# EAGLE board esp8266_ir_blaster-Panel (EAGLE 9.1.2), part 1 of 2
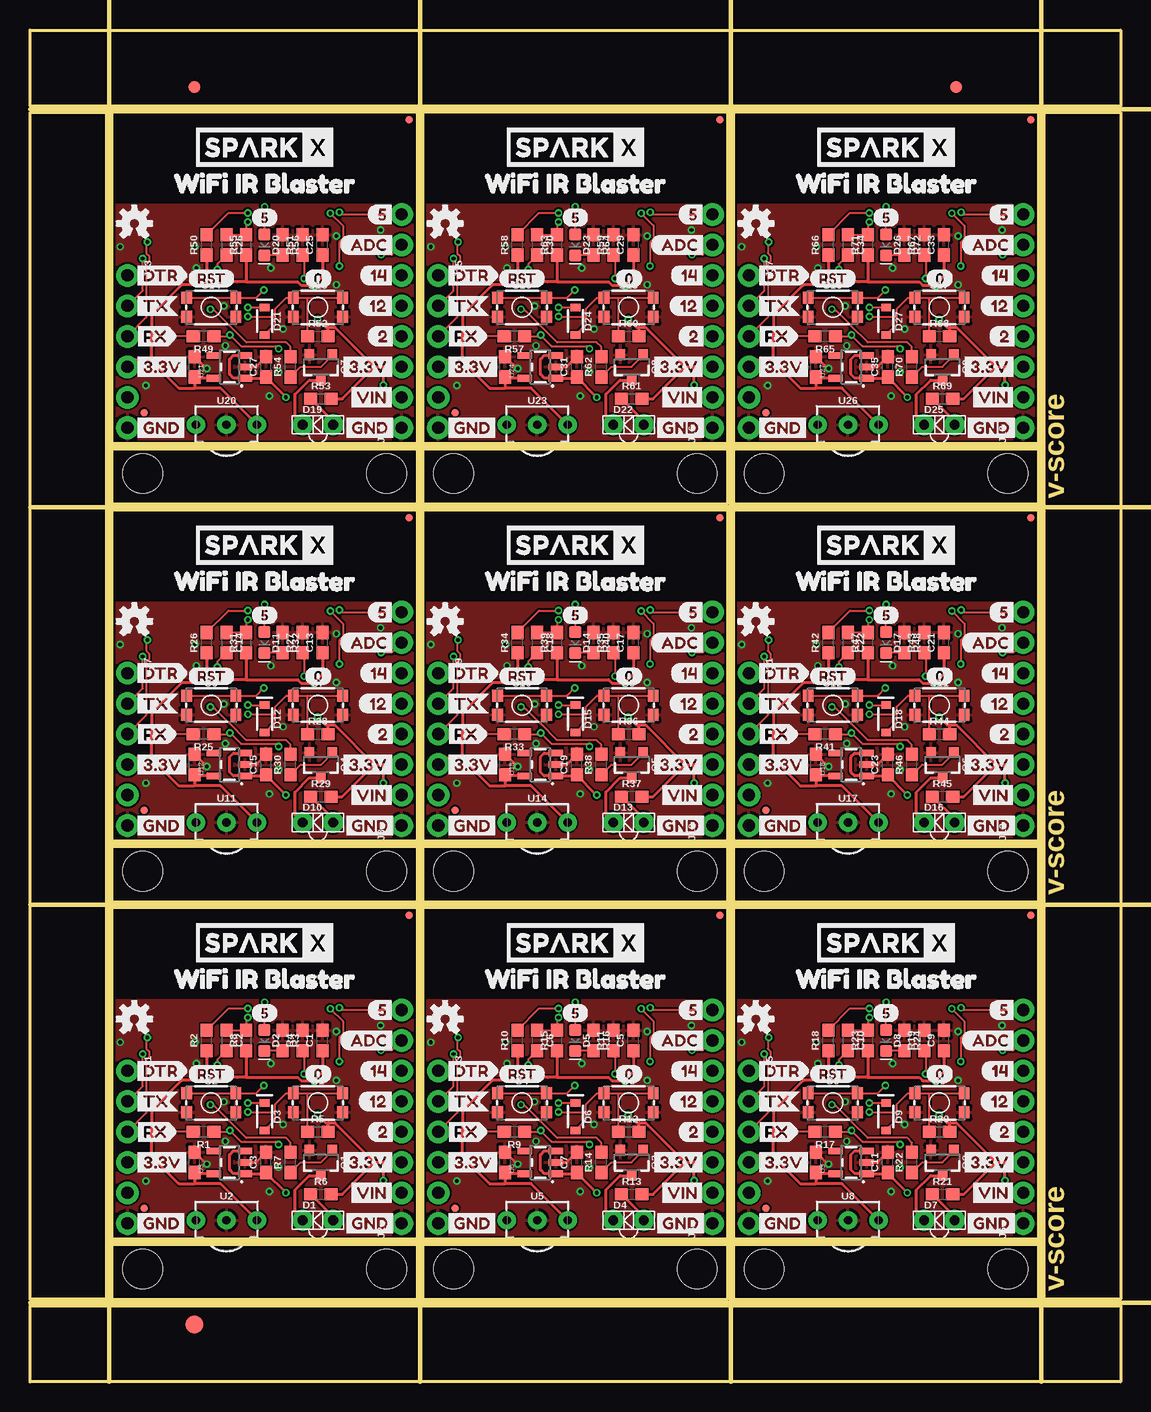
[diagram p0: board, top side]
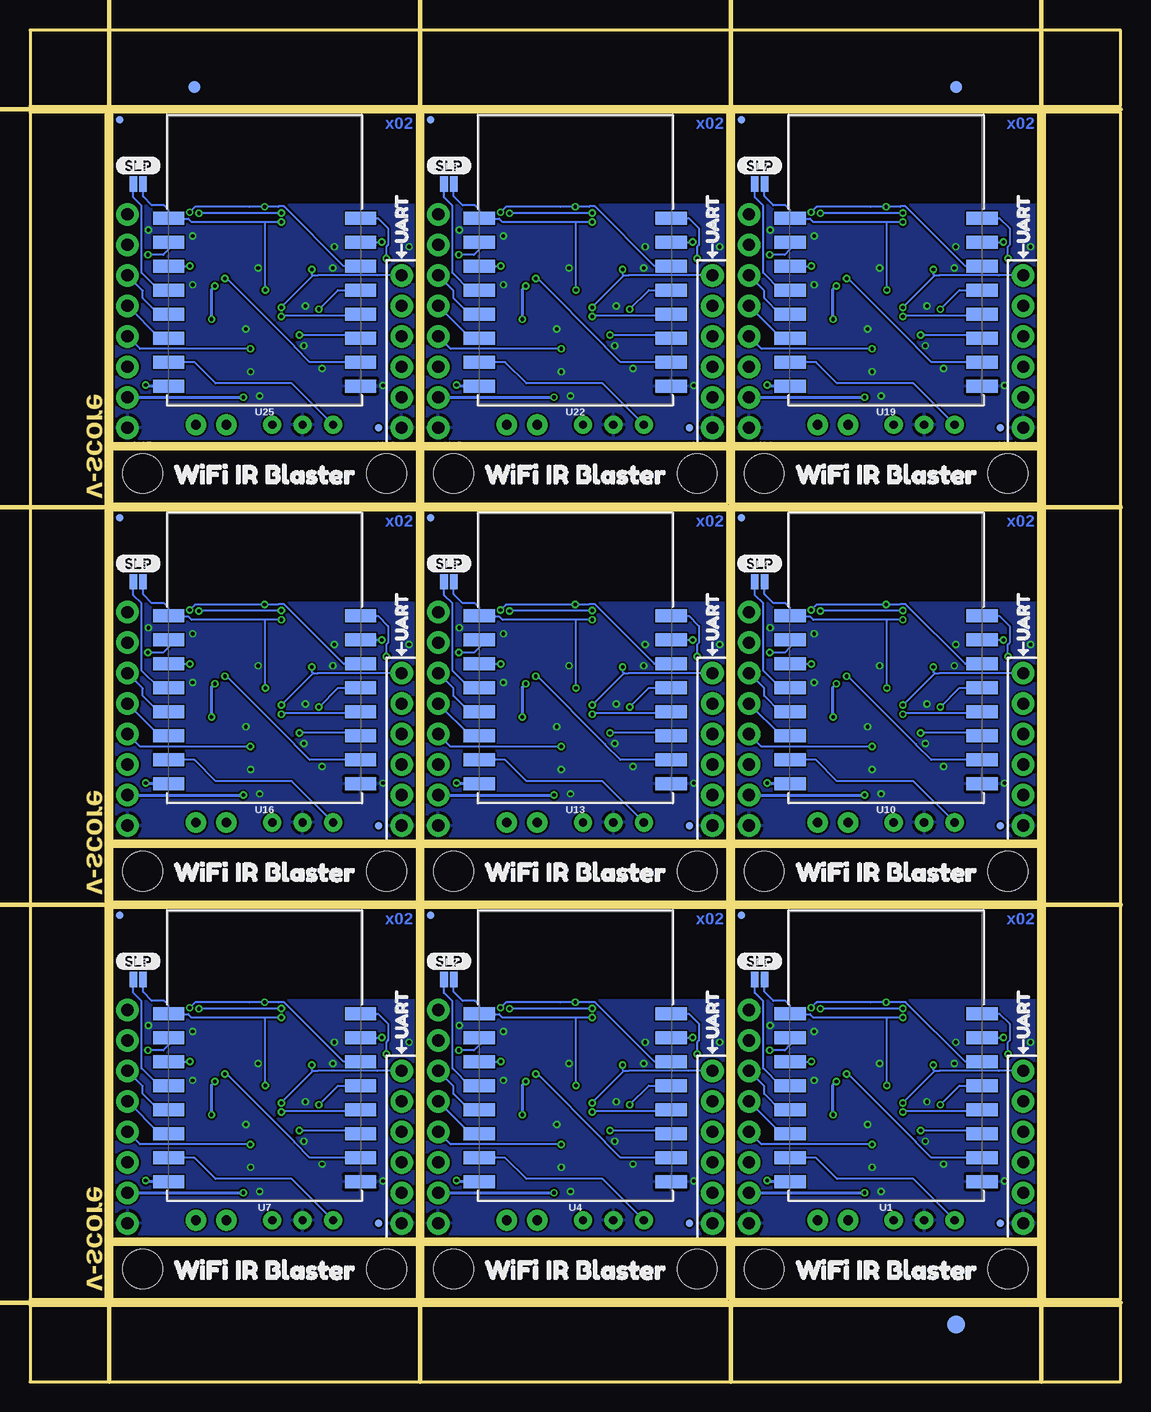
[diagram p1: board, bottom side, seen from below]

Size 90.93 x 112.65 mm. Coordinates in mm from the lower left corner, seen from the top.
Outline: 6.86,11.94 32.26,11.94 32.26,39.5 6.86,39.5 6.86,11.94
Outline: 6.86,11.43 32.26,11.43 32.26,6.86 6.86,6.86 6.86,11.43
Outline: 32.77,11.94 58.17,11.94 58.17,39.5 32.77,39.5 32.77,11.94
Outline: 32.77,11.43 58.17,11.43 58.17,6.86 32.77,6.86 32.77,11.43
Outline: 58.67,11.94 84.07,11.94 84.07,39.5 58.67,39.5 58.67,11.94
Outline: 58.67,11.43 84.07,11.43 84.07,6.86 58.67,6.86 58.67,11.43
Outline: 6.86,45.08 32.26,45.08 32.26,72.64 6.86,72.64 6.86,45.08
Outline: 6.86,44.58 32.26,44.58 32.26,40 6.86,40 6.86,44.58
Outline: 32.77,45.08 58.17,45.08 58.17,72.64 32.77,72.64 32.77,45.08
Outline: 32.77,44.58 58.17,44.58 58.17,40 32.77,40 32.77,44.58
Outline: 58.67,45.08 84.07,45.08 84.07,72.64 58.67,72.64 58.67,45.08
Outline: 58.67,44.58 84.07,44.58 84.07,40 58.67,40 58.67,44.58
Outline: 6.86,78.23 32.26,78.23 32.26,105.79 6.86,105.79 6.86,78.23
Outline: 6.86,77.72 32.26,77.72 32.26,73.15 6.86,73.15 6.86,77.72
Outline: 32.77,78.23 58.17,78.23 58.17,105.79 32.77,105.79 32.77,78.23
Outline: 32.77,77.72 58.17,77.72 58.17,73.15 32.77,73.15 32.77,77.72
Outline: 58.67,78.23 84.07,78.23 84.07,105.79 58.67,105.79 58.67,78.23
Outline: 58.67,77.72 84.07,77.72 84.07,73.15 58.67,73.15 58.67,77.72
Outline: 0,6.35 90.93,6.35 90.93,0 0,0 0,6.35
Outline: 84.58,105.79 90.93,105.79 90.93,6.86 84.58,6.86 84.58,105.79
Outline: 0,112.65 90.93,112.65 90.93,106.3 0,106.3 0,112.65
Outline: 0,105.79 6.35,105.79 6.35,6.86 0,6.86 0,105.79
Copper layers (1*16): Top 0.035mm / dielectric 1.5mm / Bottom 0.035mm
Design rules "SparkFun-2-layer-PCBWay-LIMIT": minimum track width 6mil, minimum drill 0.3mm, track to track 6mil, track to pad 6mil, pad to pad 6mil, via to via 6mil, smd to smd 6mil, copper to edge 6mil, drill to drill 6mil, minimum pad ring 6mil, minimum via ring 6mil, stop-mask expansion 4mil, vias tented up to drill 25mil, thermal gap 10mil
Milling: 17 lines

## Footprints (pad centres in the part's own frame; a part is rotated, then mirrored left to right if it is on the bottom)
0603 = smd 1.1 x 1: 1 -0.85,0; 2 0.85,0
LTE-302 = drill 0.8 pad 1.714: A 1.27,0; C -1.27,0
LED-0603 = smd 1 x 1: A -0.877,0; C 0.877,0
SOD-323 = smd 0.63 x 0.83: A 1.15,0; C -1.15,0
FIDUCIAL-1X2 = smd 1 x 1: 1 0,0
FIDUCIAL-1.5X3 = smd 1.5 x 1.5: 1 0,0
FIDUCIAL-MICRO = smd 0.635 x 0.635: 1 0,0
STAND-OFF = hole 3.302: 0,0
1X06_NO_SILK = drill 1.016 pad 1.88: 1 0,0; 2 2.54,0; 3 5.08,0; 4 7.62,0; 5 10.16,0; 6 12.7,0
1X08_NO_SILK = drill 1.016 pad 1.88: 1 0,0; 2 2.54,0; 3 5.08,0; 4 7.62,0; 5 10.16,0; 6 12.7,0; 7 15.24,0; 8 17.78,0
SMT-JUMPER_2_NO_NO-SILK = smd 0.635 x 1.27: 1 -0.406,0; 2 0.406,0
SOT23-3 = smd 0.8 x 0.9: 1 -0.95,-1; 2 0.95,-1; 3 0,1.1
TACTILE_SWITCH_SMD_4.6X2.8MM = smd 0.9 x 1: 1 -2.05,-0.8; 2 2.05,-0.8; 3 2.05,0.8; 4 -2.05,0.8
ESP-12S = smd 2.6 x 1.1: 1 -8,3.5; 2 -8,1.5; 3 -8,-0.5; 4 -8,-2.5; 5 -8,-4.5; 6 -8,-6.5; 7 -8,-8.5; 8 -8,-10.5; 9 8,-10.5; 10 8,-8.5; 11 8,-6.5; 12 8,-4.5; 13 8,-2.5; 14 8,-0.5; 15 8,1.5; 16 8,3.5
TSOP382 = drill 0.7 pad 1.524: 1 -2.54,0; 2 0,0; 3 2.54,0
SOT23-5 = smd 0.55 x 1.2: 1 -0.95,-1.3; 2 0,-1.3; 3 0.95,-1.3; 4 0.95,1.3; 5 -0.95,1.3

## Placement (x,y rotation side)
C1  1.0uF  [0603]  24.38,28.45 90 top
C2  1.0uF  [0603]  16.38,28.45 270 top
C3  1.0uF  [0603]  19.68,18.29 90 top
C4  2.2uF  [0603]  13.72,18.29 90 top
C5  1.0uF  [0603]  50.29,28.45 90 top
C6  1.0uF  [0603]  42.29,28.45 270 top
C7  1.0uF  [0603]  45.59,18.29 90 top
C8  2.2uF  [0603]  39.62,18.29 90 top
C9  1.0uF  [0603]  76.2,28.45 90 top
C10  1.0uF  [0603]  68.2,28.45 270 top
C11  1.0uF  [0603]  71.5,18.29 90 top
C12  2.2uF  [0603]  65.53,18.29 90 top
C13  1.0uF  [0603]  24.38,61.59 90 top
C14  1.0uF  [0603]  16.38,61.59 270 top
C15  1.0uF  [0603]  19.68,51.43 90 top
C16  2.2uF  [0603]  13.72,51.43 90 top
C17  1.0uF  [0603]  50.29,61.59 90 top
C18  1.0uF  [0603]  42.29,61.59 270 top
C19  1.0uF  [0603]  45.59,51.43 90 top
C20  2.2uF  [0603]  39.62,51.43 90 top
C21  1.0uF  [0603]  76.2,61.59 90 top
C22  1.0uF  [0603]  68.2,61.59 270 top
C23  1.0uF  [0603]  71.5,51.43 90 top
C24  2.2uF  [0603]  65.53,51.43 90 top
C25  1.0uF  [0603]  24.38,94.74 90 top
C26  1.0uF  [0603]  16.38,94.74 270 top
C27  1.0uF  [0603]  19.68,84.58 90 top
C28  2.2uF  [0603]  13.72,84.58 90 top
C29  1.0uF  [0603]  50.29,94.74 90 top
C30  1.0uF  [0603]  42.29,94.74 270 top
C31  1.0uF  [0603]  45.59,84.58 90 top
C32  2.2uF  [0603]  39.62,84.58 90 top
C33  1.0uF  [0603]  76.2,94.74 90 top
C34  1.0uF  [0603]  68.2,94.74 270 top
C35  1.0uF  [0603]  71.5,84.58 90 top
C36  2.2uF  [0603]  65.53,84.58 90 top
D1  IR-LED  [LTE-302]  24,13.46 0 top
D2  GREEN  [LED-0603]  19.56,28.45 270 top
D3  250mA/100V  [SOD-323]  19.56,22.1 270 top
D4  IR-LED  [LTE-302]  49.91,13.46 0 top
D5  GREEN  [LED-0603]  45.47,28.45 270 top
D6  250mA/100V  [SOD-323]  45.47,22.1 270 top
D7  IR-LED  [LTE-302]  75.82,13.46 0 top
D8  GREEN  [LED-0603]  71.37,28.45 270 top
D9  250mA/100V  [SOD-323]  71.37,22.1 270 top
D10  IR-LED  [LTE-302]  24,46.61 0 top
D11  GREEN  [LED-0603]  19.56,61.59 270 top
D12  250mA/100V  [SOD-323]  19.56,55.24 270 top
D13  IR-LED  [LTE-302]  49.91,46.61 0 top
D14  GREEN  [LED-0603]  45.47,61.59 270 top
D15  250mA/100V  [SOD-323]  45.47,55.24 270 top
D16  IR-LED  [LTE-302]  75.82,46.61 0 top
D17  GREEN  [LED-0603]  71.37,61.59 270 top
D18  250mA/100V  [SOD-323]  71.37,55.24 270 top
D19  IR-LED  [LTE-302]  24,79.76 0 top
D20  GREEN  [LED-0603]  19.56,94.74 270 top
D21  250mA/100V  [SOD-323]  19.56,88.39 270 top
D22  IR-LED  [LTE-302]  49.91,79.76 0 top
D23  GREEN  [LED-0603]  45.47,94.74 270 top
D24  250mA/100V  [SOD-323]  45.47,88.39 270 top
D25  IR-LED  [LTE-302]  75.82,79.76 0 top
D26  GREEN  [LED-0603]  71.37,94.74 270 top
D27  250mA/100V  [SOD-323]  71.37,88.39 270 top
E$1  [FIDUCIAL-1X2]  13.72,107.89 0 top
E$2  [FIDUCIAL-1X2]  13.72,107.89 0 bottom
E$3  [FIDUCIAL-1X2]  77.22,107.89 0 top
E$4  [FIDUCIAL-1X2]  77.22,107.89 0 bottom
E$5  [FIDUCIAL-1.5X3]  13.72,4.76 0 top
E$6  [FIDUCIAL-1.5X3]  13.72,4.76 0 bottom
FD1  FIDUCIALUFIDUCIAL  [FIDUCIAL-MICRO]  31.62,38.86 0 top
FD2  FIDUCIALUFIDUCIAL  [FIDUCIAL-MICRO]  9.52,14.48 0 top
FD3  FIDUCIALUFIDUCIAL  [FIDUCIAL-MICRO]  10.03,13.21 0 bottom
FD4  FIDUCIALUFIDUCIAL  [FIDUCIAL-MICRO]  31.62,38.86 0 bottom
FD5  FIDUCIALUFIDUCIAL  [FIDUCIAL-MICRO]  57.53,38.86 0 top
FD6  FIDUCIALUFIDUCIAL  [FIDUCIAL-MICRO]  35.43,14.48 0 top
FD7  FIDUCIALUFIDUCIAL  [FIDUCIAL-MICRO]  35.94,13.21 0 bottom
FD8  FIDUCIALUFIDUCIAL  [FIDUCIAL-MICRO]  57.53,38.86 0 bottom
FD9  FIDUCIALUFIDUCIAL  [FIDUCIAL-MICRO]  83.44,38.86 0 top
FD10  FIDUCIALUFIDUCIAL  [FIDUCIAL-MICRO]  61.34,14.48 0 top
FD11  FIDUCIALUFIDUCIAL  [FIDUCIAL-MICRO]  61.85,13.21 0 bottom
FD12  FIDUCIALUFIDUCIAL  [FIDUCIAL-MICRO]  83.44,38.86 0 bottom
FD13  FIDUCIALUFIDUCIAL  [FIDUCIAL-MICRO]  31.62,72.01 0 top
FD14  FIDUCIALUFIDUCIAL  [FIDUCIAL-MICRO]  9.52,47.62 0 top
FD15  FIDUCIALUFIDUCIAL  [FIDUCIAL-MICRO]  10.03,46.35 0 bottom
FD16  FIDUCIALUFIDUCIAL  [FIDUCIAL-MICRO]  31.62,72.01 0 bottom
FD17  FIDUCIALUFIDUCIAL  [FIDUCIAL-MICRO]  57.53,72.01 0 top
FD18  FIDUCIALUFIDUCIAL  [FIDUCIAL-MICRO]  35.43,47.62 0 top
FD19  FIDUCIALUFIDUCIAL  [FIDUCIAL-MICRO]  35.94,46.35 0 bottom
FD20  FIDUCIALUFIDUCIAL  [FIDUCIAL-MICRO]  57.53,72.01 0 bottom
FD21  FIDUCIALUFIDUCIAL  [FIDUCIAL-MICRO]  83.44,72.01 0 top
FD22  FIDUCIALUFIDUCIAL  [FIDUCIAL-MICRO]  61.34,47.62 0 top
FD23  FIDUCIALUFIDUCIAL  [FIDUCIAL-MICRO]  61.85,46.35 0 bottom
FD24  FIDUCIALUFIDUCIAL  [FIDUCIAL-MICRO]  83.44,72.01 0 bottom
FD25  FIDUCIALUFIDUCIAL  [FIDUCIAL-MICRO]  31.62,105.16 0 top
FD26  FIDUCIALUFIDUCIAL  [FIDUCIAL-MICRO]  9.52,80.77 0 top
FD27  FIDUCIALUFIDUCIAL  [FIDUCIAL-MICRO]  10.03,79.5 0 bottom
FD28  FIDUCIALUFIDUCIAL  [FIDUCIAL-MICRO]  31.62,105.16 0 bottom
FD29  FIDUCIALUFIDUCIAL  [FIDUCIAL-MICRO]  57.53,105.16 0 top
FD30  FIDUCIALUFIDUCIAL  [FIDUCIAL-MICRO]  35.43,80.77 0 top
FD31  FIDUCIALUFIDUCIAL  [FIDUCIAL-MICRO]  35.94,79.5 0 bottom
FD32  FIDUCIALUFIDUCIAL  [FIDUCIAL-MICRO]  57.53,105.16 0 bottom
FD33  FIDUCIALUFIDUCIAL  [FIDUCIAL-MICRO]  83.44,105.16 0 top
FD34  FIDUCIALUFIDUCIAL  [FIDUCIAL-MICRO]  61.34,80.77 0 top
FD35  FIDUCIALUFIDUCIAL  [FIDUCIAL-MICRO]  61.85,79.5 0 bottom
FD36  FIDUCIALUFIDUCIAL  [FIDUCIAL-MICRO]  83.44,105.16 0 bottom
H1  STAND-OFF  [STAND-OFF]  29.72,9.4 0 bottom
H2  STAND-OFF  [STAND-OFF]  9.4,9.4 0 bottom
H3  STAND-OFF  [STAND-OFF]  55.63,9.4 0 bottom
H4  STAND-OFF  [STAND-OFF]  35.31,9.4 0 bottom
H5  STAND-OFF  [STAND-OFF]  81.53,9.4 0 bottom
H6  STAND-OFF  [STAND-OFF]  61.21,9.4 0 bottom
H7  STAND-OFF  [STAND-OFF]  29.72,42.54 0 bottom
H8  STAND-OFF  [STAND-OFF]  9.4,42.54 0 bottom
H9  STAND-OFF  [STAND-OFF]  55.63,42.54 0 bottom
H10  STAND-OFF  [STAND-OFF]  35.31,42.54 0 bottom
H11  STAND-OFF  [STAND-OFF]  81.53,42.54 0 bottom
H12  STAND-OFF  [STAND-OFF]  61.21,42.54 0 bottom
H13  STAND-OFF  [STAND-OFF]  29.72,75.69 0 bottom
H14  STAND-OFF  [STAND-OFF]  9.4,75.69 0 bottom
H15  STAND-OFF  [STAND-OFF]  55.63,75.69 0 bottom
H16  STAND-OFF  [STAND-OFF]  35.31,75.69 0 bottom
H17  STAND-OFF  [STAND-OFF]  81.53,75.69 0 bottom
H18  STAND-OFF  [STAND-OFF]  61.21,75.69 0 bottom
J1  [1X06_NO_SILK]  8.13,25.91 270 top
J2  [1X08_NO_SILK]  30.99,13.21 90 top
J3  [1X06_NO_SILK]  34.04,25.91 270 top
J4  [1X08_NO_SILK]  56.9,13.21 90 top
J5  [1X06_NO_SILK]  59.94,25.91 270 top
J6  [1X08_NO_SILK]  82.8,13.21 90 top
J7  [1X06_NO_SILK]  8.13,59.05 270 top
J8  [1X08_NO_SILK]  30.99,46.35 90 top
J9  [1X06_NO_SILK]  34.04,59.05 270 top
J10  [1X08_NO_SILK]  56.9,46.35 90 top
J11  [1X06_NO_SILK]  59.94,59.05 270 top
J12  [1X08_NO_SILK]  82.8,46.35 90 top
J13  [1X06_NO_SILK]  8.13,92.2 270 top
J14  [1X08_NO_SILK]  30.99,79.5 90 top
J15  [1X06_NO_SILK]  34.04,92.2 270 top
J16  [1X08_NO_SILK]  56.9,79.5 90 top
J17  [1X06_NO_SILK]  59.94,92.2 270 top
J18  [1X08_NO_SILK]  82.8,79.5 90 top
JP1  Deep-Sleep  [SMT-JUMPER_2_NO_NO-SILK]  30.1,33.53 0 bottom
JP2  Deep-Sleep  [SMT-JUMPER_2_NO_NO-SILK]  56.01,33.53 0 bottom
JP3  Deep-Sleep  [SMT-JUMPER_2_NO_NO-SILK]  81.92,33.53 0 bottom
JP4  Deep-Sleep  [SMT-JUMPER_2_NO_NO-SILK]  30.1,66.67 0 bottom
JP5  Deep-Sleep  [SMT-JUMPER_2_NO_NO-SILK]  56.01,66.67 0 bottom
JP6  Deep-Sleep  [SMT-JUMPER_2_NO_NO-SILK]  81.92,66.67 0 bottom
JP7  Deep-Sleep  [SMT-JUMPER_2_NO_NO-SILK]  30.1,99.82 0 bottom
JP8  Deep-Sleep  [SMT-JUMPER_2_NO_NO-SILK]  56.01,99.82 0 bottom
JP9  Deep-Sleep  [SMT-JUMPER_2_NO_NO-SILK]  81.92,99.82 0 bottom
LOGO1  OSHW-LOGOS  [OSHW-LOGO-S]  8.7,30.23 0 top
LOGO2  SPARKX-LOGO5  [SPARKX-LARGE]  19.56,36.58 0 top
LOGO3  SPARKX-LOGO5  [SPARKX-LARGE]  45.47,36.58 0 top
LOGO4  OSHW-LOGOS  [OSHW-LOGO-S]  34.61,30.23 0 top
LOGO5  SPARKX-LOGO5  [SPARKX-LARGE]  71.37,36.58 0 top
LOGO6  OSHW-LOGOS  [OSHW-LOGO-S]  60.52,30.23 0 top
LOGO7  SPARKX-LOGO5  [SPARKX-LARGE]  19.56,69.72 0 top
LOGO8  OSHW-LOGOS  [OSHW-LOGO-S]  8.7,63.37 0 top
LOGO9  SPARKX-LOGO5  [SPARKX-LARGE]  45.47,69.72 0 top
LOGO10  OSHW-LOGOS  [OSHW-LOGO-S]  34.61,63.37 0 top
LOGO11  SPARKX-LOGO5  [SPARKX-LARGE]  71.37,69.72 0 top
LOGO12  OSHW-LOGOS  [OSHW-LOGO-S]  60.52,63.37 0 top
LOGO13  SPARKX-LOGO5  [SPARKX-LARGE]  19.56,102.87 0 top
LOGO14  OSHW-LOGOS  [OSHW-LOGO-S]  8.7,96.52 0 top
LOGO15  SPARKX-LOGO5  [SPARKX-LARGE]  45.47,102.87 0 top
LOGO16  OSHW-LOGOS  [OSHW-LOGO-S]  34.61,96.52 0 top
LOGO17  SPARKX-LOGO5  [SPARKX-LARGE]  71.37,102.87 0 top
LOGO18  OSHW-LOGOS  [OSHW-LOGO-S]  60.52,96.52 0 top
Q1  600mA/40V  [SOT23-3]  24.26,18.29 180 top
Q2  600mA/40V  [SOT23-3]  50.16,18.29 180 top
Q3  600mA/40V  [SOT23-3]  76.07,18.29 180 top
Q4  600mA/40V  [SOT23-3]  24.26,51.43 180 top
Q5  600mA/40V  [SOT23-3]  50.16,51.43 180 top
Q6  600mA/40V  [SOT23-3]  76.07,51.43 180 top
Q7  600mA/40V  [SOT23-3]  24.26,84.58 180 top
Q8  600mA/40V  [SOT23-3]  50.16,84.58 180 top
Q9  600mA/40V  [SOT23-3]  76.07,84.58 180 top
R1  10k  [0603]  14.48,20.83 180 top
R2  10k  [0603]  14.73,28.45 90 top
R3  1k  [0603]  21.08,28.45 270 top
R4  10k  [0603]  22.73,28.45 90 top
R5  1k  [0603]  24,20.83 0 top
R6  20  [0603]  24.26,15.62 0 top
R7  1k  [0603]  21.72,18.29 90 top
R8  10k  [0603]  18.03,28.45 90 top
R9  10k  [0603]  40.39,20.83 180 top
R10  10k  [0603]  40.64,28.45 90 top
R11  10k  [0603]  48.64,28.45 90 top
R12  1k  [0603]  49.91,20.83 0 top
R13  20  [0603]  50.16,15.62 0 top
R14  1k  [0603]  47.62,18.29 90 top
R15  10k  [0603]  43.94,28.45 90 top
R16  1k  [0603]  46.99,28.45 270 top
R17  10k  [0603]  66.29,20.83 180 top
R18  10k  [0603]  66.55,28.45 90 top
R19  10k  [0603]  74.55,28.45 90 top
R20  1k  [0603]  75.82,20.83 0 top
R21  20  [0603]  76.07,15.62 0 top
R22  1k  [0603]  73.53,18.29 90 top
R23  10k  [0603]  69.85,28.45 90 top
R24  1k  [0603]  72.9,28.45 270 top
R25  10k  [0603]  14.48,53.97 180 top
R26  10k  [0603]  14.73,61.59 90 top
R27  10k  [0603]  22.73,61.59 90 top
R28  1k  [0603]  24,53.97 0 top
R29  20  [0603]  24.26,48.77 0 top
R30  1k  [0603]  21.72,51.43 90 top
R31  10k  [0603]  18.03,61.59 90 top
R32  1k  [0603]  21.08,61.59 270 top
R33  10k  [0603]  40.39,53.97 180 top
R34  10k  [0603]  40.64,61.59 90 top
R35  10k  [0603]  48.64,61.59 90 top
R36  1k  [0603]  49.91,53.97 0 top
R37  20  [0603]  50.16,48.77 0 top
R38  1k  [0603]  47.62,51.43 90 top
R39  10k  [0603]  43.94,61.59 90 top
R40  1k  [0603]  46.99,61.59 270 top
R41  10k  [0603]  66.29,53.97 180 top
R42  10k  [0603]  66.55,61.59 90 top
R43  10k  [0603]  74.55,61.59 90 top
R44  1k  [0603]  75.82,53.97 0 top
R45  20  [0603]  76.07,48.77 0 top
R46  1k  [0603]  73.53,51.43 90 top
R47  10k  [0603]  69.85,61.59 90 top
R48  1k  [0603]  72.9,61.59 270 top
R49  10k  [0603]  14.48,87.12 180 top
R50  10k  [0603]  14.73,94.74 90 top
R51  10k  [0603]  22.73,94.74 90 top
R52  1k  [0603]  24,87.12 0 top
R53  20  [0603]  24.26,81.92 0 top
R54  1k  [0603]  21.72,84.58 90 top
R55  10k  [0603]  18.03,94.74 90 top
R56  1k  [0603]  21.08,94.74 270 top
R57  10k  [0603]  40.39,87.12 180 top
R58  10k  [0603]  40.64,94.74 90 top
R59  10k  [0603]  48.64,94.74 90 top
R60  1k  [0603]  49.91,87.12 0 top
R61  20  [0603]  50.16,81.92 0 top
R62  1k  [0603]  47.62,84.58 90 top
R63  10k  [0603]  43.94,94.74 90 top
R64  1k  [0603]  46.99,94.74 270 top
R65  10k  [0603]  66.29,87.12 180 top
R66  10k  [0603]  66.55,94.74 90 top
R67  10k  [0603]  74.55,94.74 90 top
R68  1k  [0603]  75.82,87.12 0 top
R69  20  [0603]  76.07,81.92 0 top
R70  1k  [0603]  73.53,84.58 90 top
R71  10k  [0603]  69.85,94.74 90 top
R72  1k  [0603]  72.9,94.74 270 top
S1  GPIO0  [TACTILE_SWITCH_SMD_4.6X2.8MM]  24,23.24 0 top
S2  RESET  [TACTILE_SWITCH_SMD_4.6X2.8MM]  15.11,23.24 0 top
S3  GPIO0  [TACTILE_SWITCH_SMD_4.6X2.8MM]  49.91,23.24 0 top
S4  RESET  [TACTILE_SWITCH_SMD_4.6X2.8MM]  41.02,23.24 0 top
S5  GPIO0  [TACTILE_SWITCH_SMD_4.6X2.8MM]  75.82,23.24 0 top
S6  RESET  [TACTILE_SWITCH_SMD_4.6X2.8MM]  66.93,23.24 0 top
S7  GPIO0  [TACTILE_SWITCH_SMD_4.6X2.8MM]  24,56.39 0 top
S8  RESET  [TACTILE_SWITCH_SMD_4.6X2.8MM]  15.11,56.39 0 top
S9  GPIO0  [TACTILE_SWITCH_SMD_4.6X2.8MM]  49.91,56.39 0 top
S10  RESET  [TACTILE_SWITCH_SMD_4.6X2.8MM]  41.02,56.39 0 top
S11  GPIO0  [TACTILE_SWITCH_SMD_4.6X2.8MM]  75.82,56.39 0 top
S12  RESET  [TACTILE_SWITCH_SMD_4.6X2.8MM]  66.93,56.39 0 top
S13  GPIO0  [TACTILE_SWITCH_SMD_4.6X2.8MM]  24,89.54 0 top
S14  RESET  [TACTILE_SWITCH_SMD_4.6X2.8MM]  15.11,89.54 0 top
S15  GPIO0  [TACTILE_SWITCH_SMD_4.6X2.8MM]  49.91,89.54 0 top
S16  RESET  [TACTILE_SWITCH_SMD_4.6X2.8MM]  41.02,89.54 0 top
S17  GPIO0  [TACTILE_SWITCH_SMD_4.6X2.8MM]  75.82,89.54 0 top
S18  RESET  [TACTILE_SWITCH_SMD_4.6X2.8MM]  66.93,89.54 0 top
U1  ESP-12S  [ESP-12S]  19.56,27.18 0 bottom
U2  38kHz  [TSOP382]  16.38,13.46 0 top
U3  3.3V  [SOT23-5]  16.64,18.29 90 top
U4  ESP-12S  [ESP-12S]  45.47,27.18 0 bottom
U5  38kHz  [TSOP382]  42.29,13.46 0 top
U6  3.3V  [SOT23-5]  42.54,18.29 90 top
U7  ESP-12S  [ESP-12S]  71.37,27.18 0 bottom
U8  38kHz  [TSOP382]  68.2,13.46 0 top
U9  3.3V  [SOT23-5]  68.45,18.29 90 top
U10  ESP-12S  [ESP-12S]  19.56,60.32 0 bottom
U11  38kHz  [TSOP382]  16.38,46.61 0 top
U12  3.3V  [SOT23-5]  16.64,51.43 90 top
U13  ESP-12S  [ESP-12S]  45.47,60.32 0 bottom
U14  38kHz  [TSOP382]  42.29,46.61 0 top
U15  3.3V  [SOT23-5]  42.54,51.43 90 top
U16  ESP-12S  [ESP-12S]  71.37,60.32 0 bottom
U17  38kHz  [TSOP382]  68.2,46.61 0 top
U18  3.3V  [SOT23-5]  68.45,51.43 90 top
U19  ESP-12S  [ESP-12S]  19.56,93.47 0 bottom
U20  38kHz  [TSOP382]  16.38,79.76 0 top
U21  3.3V  [SOT23-5]  16.64,84.58 90 top
U22  ESP-12S  [ESP-12S]  45.47,93.47 0 bottom
U23  38kHz  [TSOP382]  42.29,79.76 0 top
U24  3.3V  [SOT23-5]  42.54,84.58 90 top
U25  ESP-12S  [ESP-12S]  71.37,93.47 0 bottom
U26  38kHz  [TSOP382]  68.2,79.76 0 top
U27  3.3V  [SOT23-5]  68.45,84.58 90 top
U$1  [512]  18.41,30.73 0 top
U$2  [3#3V4]  25.65,18.29 0 top
U$3  [SLP14]  32,35.05 0 bottom
U$4  [WIFI_IR_BLASTER11]  28.47,9.32 0 bottom
U$5  [UART0]  8.13,27.69 90 bottom
U$6  [DTR1]  8.51,25.91 0 top
U$7  [WIFI_IR_BLASTER11]  36.55,33.58 0 top
U$8  [511]  28.07,30.99 0 top
U$9  [ADC10]  25.78,28.45 0 top
U$10  [129]  27.18,23.37 0 top
U$11  [148]  27.43,25.91 0 top
U$12  [27]  28.07,20.83 0 top
U$13  [WIFI_IR_BLASTER11]  10.64,33.58 0 top
U$14  [013]  22.86,25.65 0 top
U$15  [RST14]  13.14,25.65 0 top
U$16  [013]  48.77,25.65 0 top
U$17  [RST14]  39.05,25.65 0 top
U$18  [DTR1]  34.42,25.91 0 top
U$19  [TX2]  8.51,23.37 0 top
U$20  [RX3]  8.51,20.83 0 top
U$21  [3#3V4]  8.51,18.29 0 top
U$22  [GND5]  8.51,13.21 0 top
U$23  [VIN6]  26.29,15.75 0 top
U$24  [GND5]  25.91,13.21 0 top
U$25  [TX2]  34.42,23.37 0 top
U$26  [RX3]  34.42,20.83 0 top
U$27  [3#3V4]  34.42,18.29 0 top
U$28  [GND5]  34.42,13.21 0 top
U$29  [511]  53.97,30.99 0 top
U$30  [ADC10]  51.69,28.45 0 top
U$31  [129]  53.09,23.37 0 top
U$32  [148]  53.34,25.91 0 top
U$33  [27]  53.97,20.83 0 top
U$34  [VIN6]  52.2,15.75 0 top
U$35  [GND5]  51.82,13.21 0 top
U$36  [512]  44.32,30.73 0 top
U$37  [3#3V4]  51.56,18.29 0 top
U$38  [SLP14]  57.91,35.05 0 bottom
U$39  [WIFI_IR_BLASTER11]  54.38,9.32 0 bottom
U$40  [UART0]  34.04,27.69 90 bottom
U$41  [WIFI_IR_BLASTER11]  62.46,33.58 0 top
U$42  [013]  74.68,25.65 0 top
U$43  [RST14]  64.96,25.65 0 top
U$44  [DTR1]  60.32,25.91 0 top
U$45  [TX2]  60.32,23.37 0 top
U$46  [RX3]  60.32,20.83 0 top
U$47  [3#3V4]  60.32,18.29 0 top
U$48  [GND5]  60.32,13.21 0 top
U$49  [511]  79.88,30.99 0 top
U$50  [ADC10]  77.6,28.45 0 top
U$51  [129]  78.99,23.37 0 top
U$52  [148]  79.25,25.91 0 top
U$53  [27]  79.88,20.83 0 top
U$54  [VIN6]  78.11,15.75 0 top
U$55  [GND5]  77.72,13.21 0 top
U$56  [512]  70.23,30.73 0 top
U$57  [3#3V4]  77.47,18.29 0 top
U$58  [SLP14]  83.82,35.05 0 bottom
U$59  [WIFI_IR_BLASTER11]  80.29,9.32 0 bottom
U$60  [UART0]  59.94,27.69 90 bottom
U$61  [WIFI_IR_BLASTER11]  10.64,66.73 0 top
U$62  [013]  22.86,58.8 0 top
U$63  [RST14]  13.14,58.8 0 top
U$64  [DTR1]  8.51,59.05 0 top
U$65  [TX2]  8.51,56.51 0 top
U$66  [RX3]  8.51,53.97 0 top
U$67  [3#3V4]  8.51,51.43 0 top
U$68  [GND5]  8.51,46.35 0 top
U$69  [511]  28.07,64.14 0 top
U$70  [ADC10]  25.78,61.59 0 top
U$71  [129]  27.18,56.51 0 top
U$72  [148]  27.43,59.05 0 top
U$73  [27]  28.07,53.97 0 top
U$74  [VIN6]  26.29,48.89 0 top
U$75  [GND5]  25.91,46.35 0 top
U$76  [512]  18.41,63.88 0 top
U$77  [3#3V4]  25.65,51.43 0 top
U$78  [SLP14]  32,68.2 0 bottom
U$79  [WIFI_IR_BLASTER11]  28.47,42.47 0 bottom
U$80  [UART0]  8.13,60.83 90 bottom
U$81  [WIFI_IR_BLASTER11]  36.55,66.73 0 top
U$82  [013]  48.77,58.8 0 top
U$83  [RST14]  39.05,58.8 0 top
U$84  [DTR1]  34.42,59.05 0 top
U$85  [TX2]  34.42,56.51 0 top
U$86  [RX3]  34.42,53.97 0 top
U$87  [3#3V4]  34.42,51.43 0 top
U$88  [GND5]  34.42,46.35 0 top
U$89  [511]  53.97,64.14 0 top
U$90  [ADC10]  51.69,61.59 0 top
U$91  [129]  53.09,56.51 0 top
U$92  [148]  53.34,59.05 0 top
U$93  [27]  53.97,53.97 0 top
U$94  [VIN6]  52.2,48.89 0 top
U$95  [GND5]  51.82,46.35 0 top
U$96  [512]  44.32,63.88 0 top
U$97  [3#3V4]  51.56,51.43 0 top
U$98  [SLP14]  57.91,68.2 0 bottom
U$99  [WIFI_IR_BLASTER11]  54.38,42.47 0 bottom
U$100  [UART0]  34.04,60.83 90 bottom
U$101  [WIFI_IR_BLASTER11]  62.46,66.73 0 top
U$102  [013]  74.68,58.8 0 top
U$103  [RST14]  64.96,58.8 0 top
U$104  [DTR1]  60.32,59.05 0 top
U$105  [TX2]  60.32,56.51 0 top
U$106  [RX3]  60.32,53.97 0 top
U$107  [3#3V4]  60.32,51.43 0 top
U$108  [GND5]  60.32,46.35 0 top
U$109  [511]  79.88,64.14 0 top
U$110  [ADC10]  77.6,61.59 0 top
U$111  [129]  78.99,56.51 0 top
U$112  [148]  79.25,59.05 0 top
U$113  [27]  79.88,53.97 0 top
U$114  [VIN6]  78.11,48.89 0 top
U$115  [GND5]  77.72,46.35 0 top
U$116  [512]  70.23,63.88 0 top
U$117  [3#3V4]  77.47,51.43 0 top
U$118  [SLP14]  83.82,68.2 0 bottom
U$119  [WIFI_IR_BLASTER11]  80.29,42.47 0 bottom
U$120  [UART0]  59.94,60.83 90 bottom
U$121  [WIFI_IR_BLASTER11]  10.64,99.87 0 top
U$122  [013]  22.86,91.95 0 top
U$123  [RST14]  13.14,91.95 0 top
U$124  [DTR1]  8.51,92.2 0 top
U$125  [TX2]  8.51,89.66 0 top
U$126  [RX3]  8.51,87.12 0 top
U$127  [3#3V4]  8.51,84.58 0 top
U$128  [GND5]  8.51,79.5 0 top
U$129  [511]  28.07,97.28 0 top
U$130  [ADC10]  25.78,94.74 0 top
U$131  [129]  27.18,89.66 0 top
U$132  [148]  27.43,92.2 0 top
U$133  [27]  28.07,87.12 0 top
U$134  [VIN6]  26.29,82.04 0 top
U$135  [GND5]  25.91,79.5 0 top
U$136  [512]  18.41,97.03 0 top
U$137  [3#3V4]  25.65,84.58 0 top
U$138  [SLP14]  32,101.35 0 bottom
U$139  [WIFI_IR_BLASTER11]  28.47,75.62 0 bottom
U$140  [UART0]  8.13,93.98 90 bottom
U$141  [WIFI_IR_BLASTER11]  36.55,99.87 0 top
U$142  [013]  48.77,91.95 0 top
U$143  [RST14]  39.05,91.95 0 top
U$144  [DTR1]  34.42,92.2 0 top
U$145  [TX2]  34.42,89.66 0 top
U$146  [RX3]  34.42,87.12 0 top
U$147  [3#3V4]  34.42,84.58 0 top
U$148  [GND5]  34.42,79.5 0 top
U$149  [511]  53.97,97.28 0 top
U$150  [ADC10]  51.69,94.74 0 top
U$151  [129]  53.09,89.66 0 top
U$152  [148]  53.34,92.2 0 top
U$153  [27]  53.97,87.12 0 top
U$154  [VIN6]  52.2,82.04 0 top
U$155  [GND5]  51.82,79.5 0 top
U$156  [512]  44.32,97.03 0 top
U$157  [3#3V4]  51.56,84.58 0 top
U$158  [SLP14]  57.91,101.35 0 bottom
U$159  [WIFI_IR_BLASTER11]  54.38,75.62 0 bottom
U$160  [UART0]  34.04,93.98 90 bottom
U$161  [WIFI_IR_BLASTER11]  62.46,99.87 0 top
U$162  [013]  74.68,91.95 0 top
U$163  [RST14]  64.96,91.95 0 top
U$164  [DTR1]  60.32,92.2 0 top
U$165  [TX2]  60.32,89.66 0 top
U$166  [RX3]  60.32,87.12 0 top
U$167  [3#3V4]  60.32,84.58 0 top
U$168  [GND5]  60.32,79.5 0 top
U$169  [511]  79.88,97.28 0 top
U$170  [ADC10]  77.6,94.74 0 top
U$171  [129]  78.99,89.66 0 top
U$172  [148]  79.25,92.2 0 top
U$173  [27]  79.88,87.12 0 top
U$174  [VIN6]  78.11,82.04 0 top
U$175  [GND5]  77.72,79.5 0 top
U$176  [512]  70.23,97.03 0 top
U$177  [3#3V4]  77.47,84.58 0 top
U$178  [SLP14]  83.82,101.35 0 bottom
U$179  [WIFI_IR_BLASTER11]  80.29,75.62 0 bottom
U$180  [UART0]  59.94,93.98 90 bottom

## Library data of the parts
C1-C3 C5-C7 C9-C11 C13-C15 C17-C19 C21-C23 C25-C27 C29-C31 C33-C35 = SparkFun-Capacitors; PROD_ID: CAP-00868
C4 C8 C12 C16 C20 C24 C28 C32 C36 = SparkFun-Capacitors; PROD_ID: CAP-07888
D1 D4 D7 D10 D13 D16 D19 D22 D25 = SparkFun-LED; PROD_ID: DIO-10904; SF_ID: SEN-00241
D2 D5 D8 D11 D14 D17 D20 D23 D26 = SparkFun-LED; PROD_ID: DIO-00821
D3 D6 D9 D12 D15 D18 D21 D24 D27 = SparkFun-DiscreteSemi; PROD_ID: DIO-09646
E$1-E$4 FD1-FD36 LOGO1 LOGO4 LOGO6 LOGO8 LOGO10 LOGO12 LOGO14 LOGO16 LOGO18 = SparkFun-Aesthetics
E$5 E$6 = SparkFun-Retired
H1-H18 = SparkFun-Hardware
J1 J3 J5 J7 J9 J11 J13 J15 J17 = SparkFun-Connectors
J2 J4 J6 J8 J10 J12 J14 J16 J18 = SparkFun-Connectors; PROD_ID: CONN-08438
JP1-JP9 = SparkFun-Jumpers
LOGO2 LOGO3 LOGO5 LOGO7 LOGO9 LOGO11 LOGO13 LOGO15 LOGO17 = SparkX
Q1-Q9 = SparkFun-DiscreteSemi; PROD_ID: TRANS-08049
R1 R2 R4 R8-R11 R15 R17-R19 R23 R25-R27 R31 R33-R35 R39 R41-R43 R47 R49-R51 R55 R57-R59 R63 R65-R67 R71 = SparkFun-Resistors; PROD_ID: RES-00824
R3 R5 R7 R12 R14 R16 R20 R22 R24 R28 R30 R32 R36 R38 R40 R44 R46 R48 R52 R54 R56 R60 R62 R64 R68 R70 R72 = SparkFun-Resistors; PROD_ID: RES-07856
R6 R13 R21 R29 R37 R45 R53 R61 R69 = SparkFun-Resistors; PROD_ID: RES-07862
S1-S18 = SparkFun-Switches; PROD_ID: SWCH-13065
U1 U2 U4 U5 U7 U8 U10 U11 U13 U14 U16 U17 U19 U20 U22 U23 U25 U26 = esp8266_ir_blaster
U3 U6 U9 U12 U15 U18 U21 U24 U27 = SparkFun-IC-Power; PROD_ID: VREG-12457
U$1-U$4 U$6-U$39 U$41-U$59 U$61-U$79 U$81-U$99 U$101-U$119 U$121-U$139 U$141-U$159 U$161-U$179 = buzzard_labels
U$5 U$40 U$60 U$80 U$100 U$120 U$140 U$160 U$180 = buzzard_labels-02

## Nets
3.3V: C1.1 C4.1 J1.4 J2.3 R1.2 R2.1 R5.2 R6.2 R8.1 U1.8 U2.3 U3.5
3.3V1: C5.1 C8.1 J3.4 J4.3 R9.2 R10.1 R12.2 R13.2 R15.1 U4.8 U5.3 U6.5
3.3V2: C9.1 C12.1 J5.4 J6.3 R17.2 R18.1 R20.2 R21.2 R23.1 U7.8 U8.3 U9.5
3.3V3: C13.1 C16.1 J7.4 J8.3 R25.2 R26.1 R28.2 R29.2 R31.1 U10.8 U11.3 U12.5
3.3V4: C17.1 C20.1 J9.4 J10.3 R33.2 R34.1 R36.2 R37.2 R39.1 U13.8 U14.3 U15.5
3.3V5: C21.1 C24.1 J11.4 J12.3 R41.2 R42.1 R44.2 R45.2 R47.1 U16.8 U17.3 U18.5
3.3V6: C25.1 C28.1 J13.4 J14.3 R49.2 R50.1 R52.2 R53.2 R55.1 U19.8 U20.3 U21.5
3.3V7: C29.1 C32.1 J15.4 J16.3 R57.2 R58.1 R60.2 R61.2 R63.1 U22.8 U23.3 U24.5
3.3V8: C33.1 C36.1 J17.4 J18.3 R65.2 R66.1 R68.2 R69.2 R71.1 U25.8 U26.3 U27.5
ADC: J2.7 U1.2
ADC1: J4.7 U4.2
ADC2: J6.7 U7.2
ADC3: J8.7 U10.2
ADC4: J10.7 U13.2
ADC5: J12.7 U16.2
ADC6: J14.7 U19.2
ADC7: J16.7 U22.2
ADC8: J18.7 U25.2
CHIP_EN: R2.2 U1.3
CHIP_EN1: R10.2 U4.3
CHIP_EN2: R18.2 U7.3
CHIP_EN3: R26.2 U10.3
CHIP_EN4: R34.2 U13.3
CHIP_EN5: R42.2 U16.3
CHIP_EN6: R50.2 U19.3
CHIP_EN7: R58.2 U22.3
CHIP_EN8: R66.2 U25.3
DTR: C2.2 D3.C J1.1
DTR1: C6.2 D6.C J3.1
DTR2: C10.2 D9.C J5.1
DTR3: C14.2 D12.C J7.1
DTR4: C18.2 D15.C J9.1
DTR5: C22.2 D18.C J11.1
DTR6: C26.2 D21.C J13.1
DTR7: C30.2 D24.C J15.1
DTR8: C34.2 D27.C J17.1
GND: C1.2 C3.2 C4.2 J1.6 J2.1 Q1.2 R3.1 R4.2 S1.1 S1.2 S2.1 S2.2 U1.9 U2.2 U3.2
GND1: C5.2 C7.2 C8.2 J3.6 J4.1 Q2.2 R11.2 R16.1 S3.1 S3.2 S4.1 S4.2 U4.9 U5.2 U6.2
GND2: C9.2 C11.2 C12.2 J5.6 J6.1 Q3.2 R19.2 R24.1 S5.1 S5.2 S6.1 S6.2 U7.9 U8.2 U9.2
GND3: C13.2 C15.2 C16.2 J7.6 J8.1 Q4.2 R27.2 R32.1 S7.1 S7.2 S8.1 S8.2 U10.9 U11.2 U12.2
GND4: C17.2 C19.2 C20.2 J9.6 J10.1 Q5.2 R35.2 R40.1 S9.1 S9.2 S10.1 S10.2 U13.9 U14.2 U15.2
GND5: C21.2 C23.2 C24.2 J11.6 J12.1 Q6.2 R43.2 R48.1 S11.1 S11.2 S12.1 S12.2 U16.9 U17.2 U18.2
GND6: C25.2 C27.2 C28.2 J13.6 J14.1 Q7.2 R51.2 R56.1 S13.1 S13.2 S14.1 S14.2 U19.9 U20.2 U21.2
GND7: C29.2 C31.2 C32.2 J15.6 J16.1 Q8.2 R59.2 R64.1 S15.1 S15.2 S16.1 S16.2 U22.9 U23.2 U24.2
GND8: C33.2 C35.2 C36.2 J17.6 J18.1 Q9.2 R67.2 R72.1 S17.1 S17.2 S18.1 S18.2 U25.9 U26.2 U27.2
IO0: D3.A R5.1 S1.3 S1.4 U1.12
IO1: R11.1 U4.10
IO2: J2.4 R1.1 U1.11
IO3: J4.4 R9.1 U4.11
IO4: D6.A R12.1 S3.3 S3.4 U4.12
IO5: D2.A J2.8 U1.14
IO6: J4.6 U4.5
IO7: JP2.1 U4.4
IO8: J4.5 U4.6
IO9: D5.A J4.8 U4.14
IO10: R19.1 U7.10
IO11: J6.4 R17.1 U7.11
IO12: J2.5 U1.6
IO13: D9.A R20.1 S5.3 S5.4 U7.12
IO14: J2.6 U1.5
IO15: R4.1 U1.10
IO16: JP1.1 U1.4
IO17: J6.6 U7.5
IO18: JP3.1 U7.4
IO19: J6.5 U7.6
IO20: D8.A J6.8 U7.14
IO21: R27.1 U10.10
IO22: J8.4 R25.1 U10.11
IO23: D12.A R28.1 S7.3 S7.4 U10.12
IO24: J8.6 U10.5
IO25: JP4.1 U10.4
IO26: J8.5 U10.6
IO27: D11.A J8.8 U10.14
IO28: R35.1 U13.10
IO29: J10.4 R33.1 U13.11
IO30: D15.A R36.1 S9.3 S9.4 U13.12
IO31: J10.6 U13.5
IO32: JP5.1 U13.4
IO33: J10.5 U13.6
IO34: D14.A J10.8 U13.14
IO35: R43.1 U16.10
IO36: J12.4 R41.1 U16.11
IO37: D18.A R44.1 S11.3 S11.4 U16.12
IO38: J12.6 U16.5
IO39: JP6.1 U16.4
IO40: J12.5 U16.6
IO41: D17.A J12.8 U16.14
IO42: R51.1 U19.10
IO43: J14.4 R49.1 U19.11
IO44: D21.A R52.1 S13.3 S13.4 U19.12
IO45: J14.6 U19.5
IO46: JP7.1 U19.4
IO47: J14.5 U19.6
IO48: D20.A J14.8 U19.14
IO49: R59.1 U22.10
IO50: J16.4 R57.1 U22.11
IO51: D24.A R60.1 S15.3 S15.4 U22.12
IO52: J16.6 U22.5
IO53: JP8.1 U22.4
IO54: J16.5 U22.6
IO55: D23.A J16.8 U22.14
IO56: R67.1 U25.10
IO57: J18.4 R65.1 U25.11
IO58: D27.A R68.1 S17.3 S17.4 U25.12
IO59: J18.6 U25.5
IO60: JP9.1 U25.4
IO61: J18.5 U25.6
IO62: D26.A J18.8 U25.14
IR_IN: U1.7 U2.1
IR_IN1: U4.7 U5.1
IR_IN2: U7.7 U8.1
IR_IN3: U10.7 U11.1
IR_IN4: U13.7 U14.1
IR_IN5: U16.7 U17.1
IR_IN6: U19.7 U20.1
IR_IN7: U22.7 U23.1
IR_IN8: U25.7 U26.1
IR_OUT: R7.2 U1.13
IR_OUT1: R14.2 U4.13
IR_OUT2: R22.2 U7.13
IR_OUT3: R30.2 U10.13
IR_OUT4: R38.2 U13.13
IR_OUT5: R46.2 U16.13
IR_OUT6: R54.2 U19.13
IR_OUT7: R62.2 U22.13
IR_OUT8: R70.2 U25.13
N$1: D2.C R3.2
N$2: D4.C Q2.3
N$3: D4.A R13.1
N$4: Q2.1 R14.1
N$5: D1.C Q1.3
N$6: D1.A R6.1
N$7: Q1.1 R7.1
N$8: D5.C R16.2
N$9: D7.C Q3.3
N$10: D7.A R21.1
N$11: Q3.1 R22.1
N$12: D8.C R24.2
N$13: D10.C Q4.3
N$14: D10.A R29.1
N$15: Q4.1 R30.1
N$16: D11.C R32.2
N$17: D13.C Q5.3
N$18: D13.A R37.1
N$19: Q5.1 R38.1
N$20: D14.C R40.2
N$21: D16.C Q6.3
N$22: D16.A R45.1
N$23: Q6.1 R46.1
N$24: D17.C R48.2
N$25: D19.C Q7.3
N$26: D19.A R53.1
N$27: Q7.1 R54.1
N$28: D20.C R56.2
N$29: D22.C Q8.3
N$30: D22.A R61.1
N$31: Q8.1 R62.1
N$32: D23.C R64.2
N$33: D25.C Q9.3
N$34: D25.A R69.1
N$35: Q9.1 R70.1
N$36: D26.C R72.2
RESET: C2.1 JP1.2 R8.2 S2.3 S2.4 U1.1
RESET1: C6.1 JP2.2 R15.2 S4.3 S4.4 U4.1
RESET2: C10.1 JP3.2 R23.2 S6.3 S6.4 U7.1
RESET3: C14.1 JP4.2 R31.2 S8.3 S8.4 U10.1
RESET4: C18.1 JP5.2 R39.2 S10.3 S10.4 U13.1
RESET5: C22.1 JP6.2 R47.2 S12.3 S12.4 U16.1
RESET6: C26.1 JP7.2 R55.2 S14.3 S14.4 U19.1
RESET7: C30.1 JP8.2 R63.2 S16.3 S16.4 U22.1
RESET8: C34.1 JP9.2 R71.2 S18.3 S18.4 U25.1
RXI: J1.3 U1.15
RXI1: J3.3 U4.15
RXI2: J5.3 U7.15
RXI3: J7.3 U10.15
RXI4: J9.3 U13.15
RXI5: J11.3 U16.15
RXI6: J13.3 U19.15
RXI7: J15.3 U22.15
RXI8: J17.3 U25.15
TXO: J1.2 U1.16
TXO1: J3.2 U4.16
TXO2: J5.2 U7.16
TXO3: J7.2 U10.16
TXO4: J9.2 U13.16
TXO5: J11.2 U16.16
TXO6: J13.2 U19.16
TXO7: J15.2 U22.16
TXO8: J17.2 U25.16
VIN: C3.1 J2.2 U3.1 U3.3
VIN1: C7.1 J4.2 U6.1 U6.3
VIN2: C11.1 J6.2 U9.1 U9.3
VIN3: C15.1 J8.2 U12.1 U12.3
VIN4: C19.1 J10.2 U15.1 U15.3
VIN5: C23.1 J12.2 U18.1 U18.3
VIN6: C27.1 J14.2 U21.1 U21.3
VIN7: C31.1 J16.2 U24.1 U24.3
VIN8: C35.1 J18.2 U27.1 U27.3